# EAGLE board Qwiic LED Stick-Panel (EAGLE 9.6.2), part 1 of 2
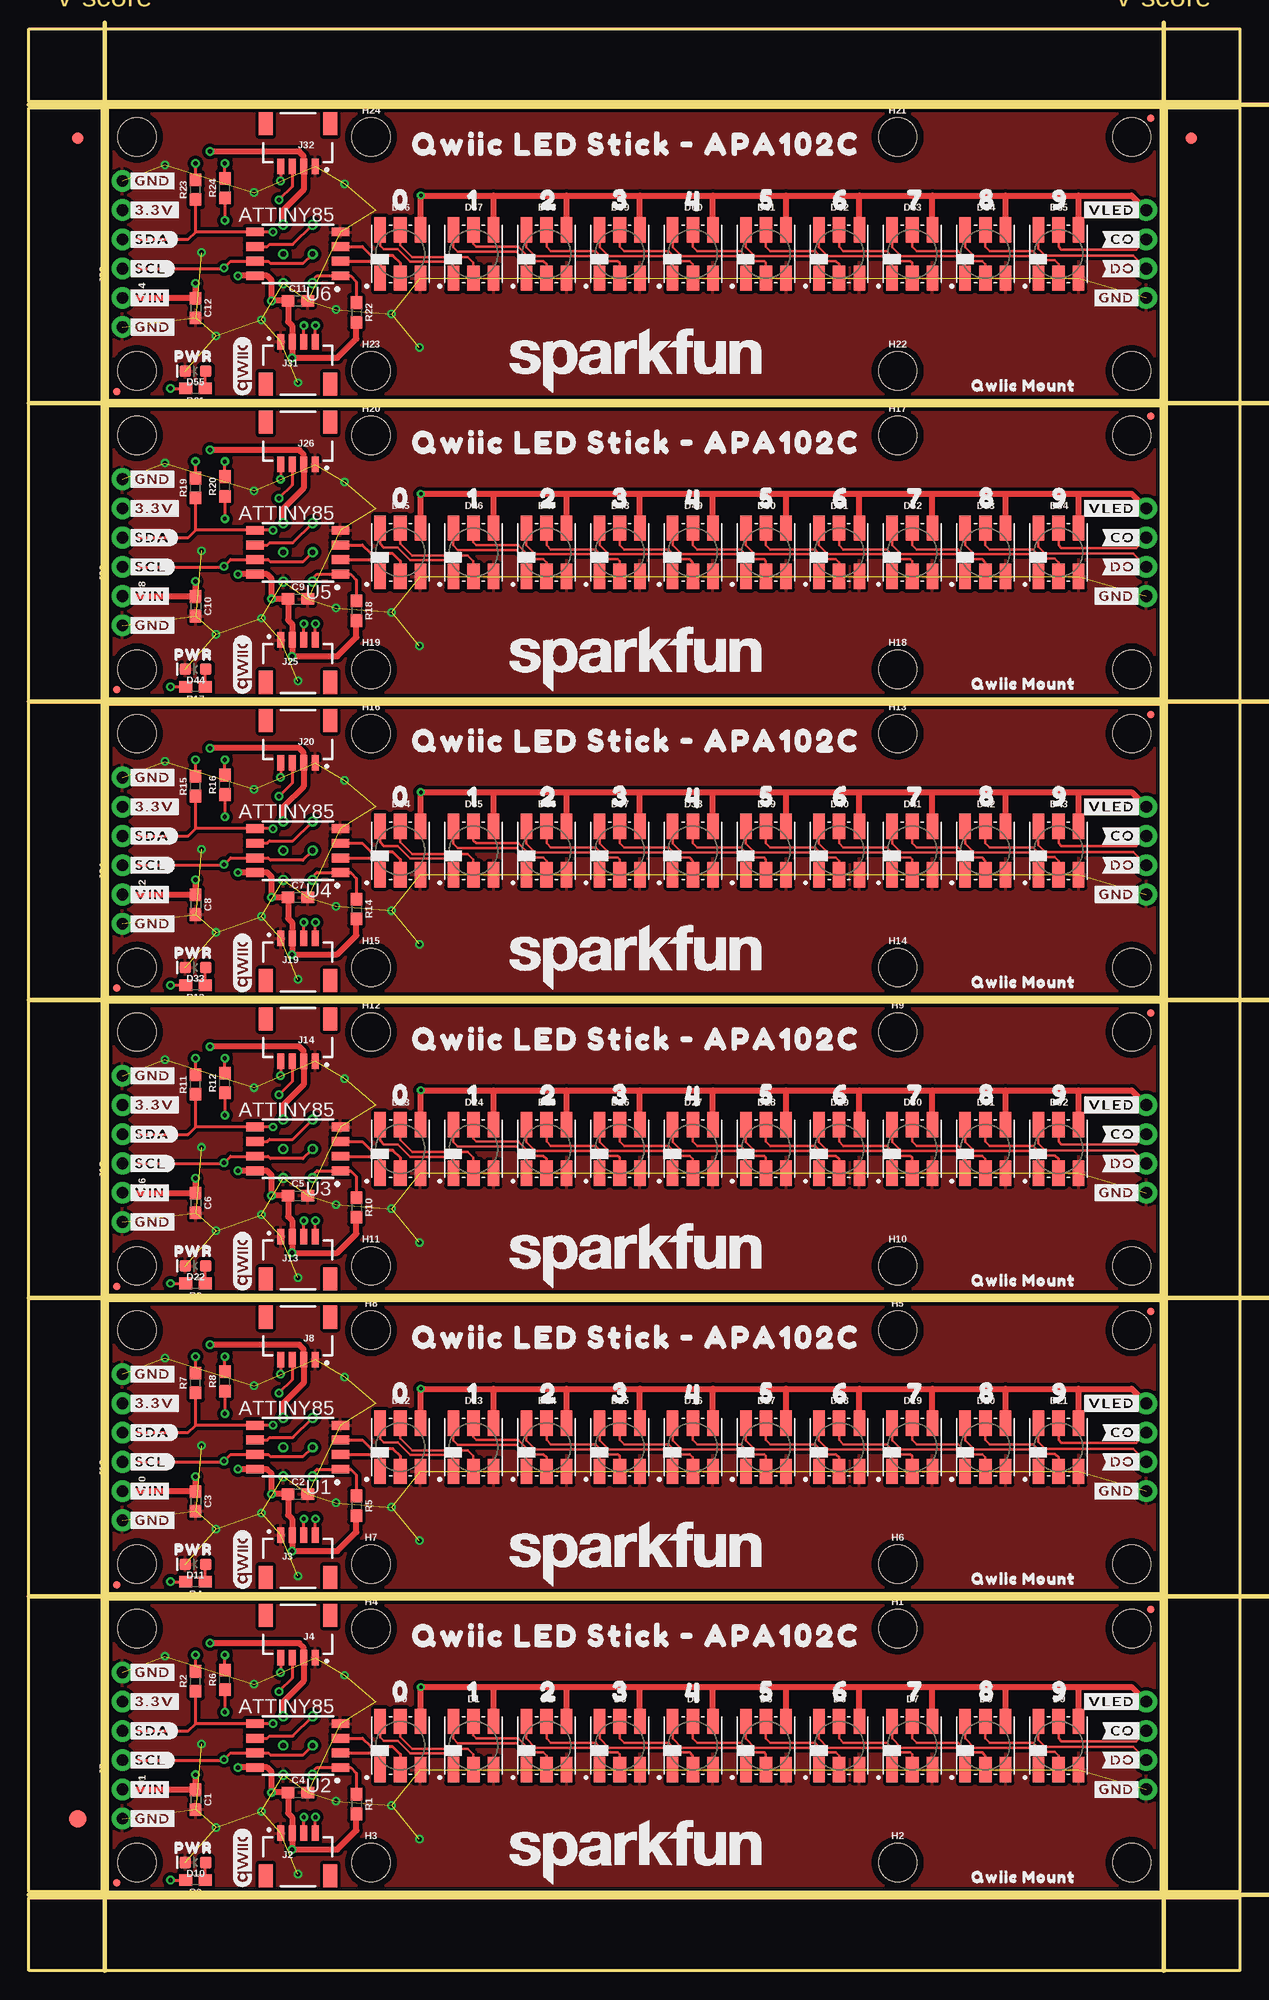
[diagram p0: board, top side]
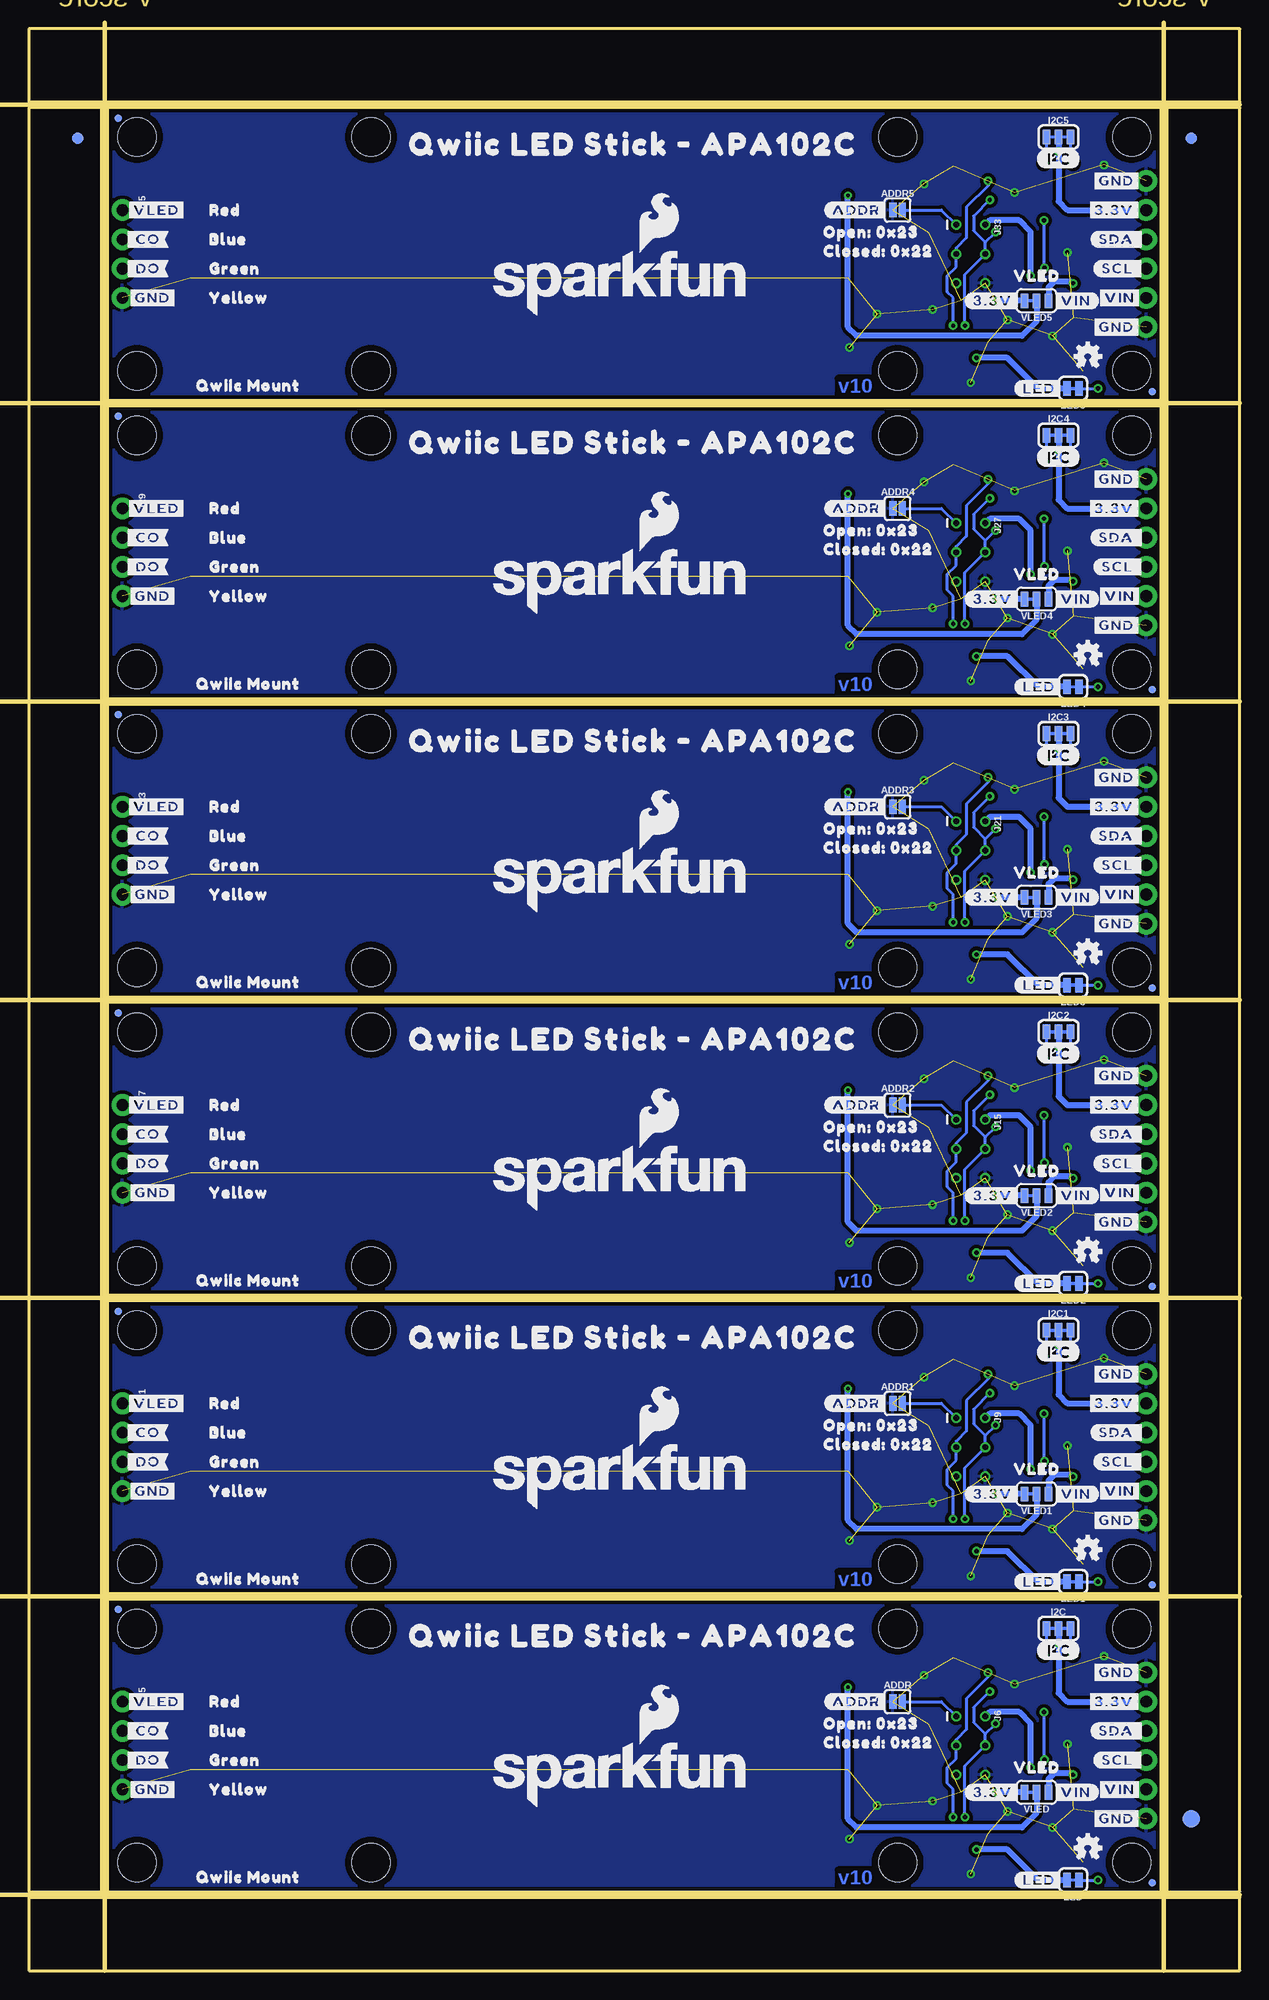
[diagram p1: board, bottom side, seen from below]

Size 105.16 x 168.66 mm. Coordinates in mm from the lower left corner, seen from the top.
Outline: 98.3,6.86 6.86,6.86 6.86,32.26 98.3,32.26 98.3,6.86
Outline: 98.3,32.77 6.86,32.77 6.86,58.17 98.3,58.17 98.3,32.77
Outline: 98.3,58.67 6.86,58.67 6.86,84.07 98.3,84.07 98.3,58.67
Outline: 98.3,84.58 6.86,84.58 6.86,109.98 98.3,109.98 98.3,84.58
Outline: 98.3,110.49 6.86,110.49 6.86,135.89 98.3,135.89 98.3,110.49
Outline: 98.3,136.4 6.86,136.4 6.86,161.8 98.3,161.8 98.3,136.4
Outline: 0,6.35 105.16,6.35 105.16,0 0,0 0,6.35
Outline: 98.81,161.8 105.16,161.8 105.16,6.86 98.81,6.86 98.81,161.8
Outline: 0,168.66 105.16,168.66 105.16,162.31 0,162.31 0,168.66
Outline: 0,161.8 6.35,161.8 6.35,6.86 0,6.86 0,161.8
Copper layers (1*16): Top 0.035mm / dielectric 1.5mm / Bottom 0.035mm
Design rules "Qwiic LED Stick": minimum track width 7mil, minimum drill 0.3mm, track to track 7mil, track to pad 7mil, pad to pad 7mil, via to via 7mil, smd to smd 7mil, copper to edge 7mil, drill to drill 7mil, minimum pad ring 7mil, minimum via ring 7mil, stop-mask expansion 3mil, vias tented up to drill 25mil, thermal gap 10mil
Milling: 9 lines

## Footprints (pad centres in the part's own frame; a part is rotated, then mirrored left to right if it is on the bottom)
SMT-JUMPER_2_NO_SILK = smd 0.635 x 1.27: 1 -0.406,0; 2 0.406,0
0603 = smd 1.1 x 1: 1 -0.85,0; 2 0.85,0
APA102-5050 = smd 1 x 2.2: P1 -1.75,-2.1; P3 1.75,-2.1; P4 1.75,2.1; P6 -1.75,2.1 | smd 1.1 x 2.2: P2 0,-2.1; P5 0,2.1
LED-0603 = smd 1 x 1: A -0.877,0; C 0.877,0
FIDUCIAL-1X2 = smd 1 x 1: 1 0,0
FIDUCIAL-1.5X3 = smd 1.5 x 1.5: 1 0,0
STAND-OFF = hole 3.302: 0,0
SMT-JUMPER_3_2-NC_TRACE_SILK = smd 0.66 x 1.27: 1 -1.041,0; 2 0,0; 3 1.041,0
1X02_NO_SILK = drill 1.016 pad 1.88: 1 0,0; 2 2.54,0
JST04_1MM_RA = smd 0.6 x 1.35: 1 -1.5,0; 2 -0.5,0; 3 0.5,0; 4 1.5,0 | smd 1.2 x 2: NC1 2.8,-3.675; NC2 -2.8,-3.675
1X04_NO_SILK = drill 1.016 pad 1.88: 1 0,0; 2 2.54,0; 3 5.08,0; 4 7.62,0
2X3_TEST_POINTS = drill 0.508: 1 -2.54,-1.27; 2 -2.54,1.27; 3 0,-1.27; 4 0,1.27; 5 2.54,-1.27; 6 2.54,1.27
FIDUCIAL-MICRO = smd 0.635 x 0.635: 1 0,0
SMT-JUMPER_2_NC_TRACE_SILK = smd 0.66 x 1.27: 1 -0.521,0; 2 0.521,0
ATTINY85 = smd 1.524 x 0.762: 1 -3.683,1.905; 2 -3.683,0.635; 3 -3.683,-0.635; 4 -3.683,-1.905; 5 3.727,-1.905; 6 3.727,-0.635; 7 3.727,0.635; 8 3.727,1.905
SMT-JUMPER_3_1-NC_TRACE_SILK = smd 0.66 x 1.27: 1 -1.041,0; 2 0,0; 3 1.041,0

## Placement (x,y rotation side)
ADDR  JUMPER-SMT_2_NO_SILK  [SMT-JUMPER_2_NO_SILK]  29.72,23.37 0 bottom
ADDR1  JUMPER-SMT_2_NO_SILK  [SMT-JUMPER_2_NO_SILK]  29.72,49.28 0 bottom
ADDR2  JUMPER-SMT_2_NO_SILK  [SMT-JUMPER_2_NO_SILK]  29.72,75.18 0 bottom
ADDR3  JUMPER-SMT_2_NO_SILK  [SMT-JUMPER_2_NO_SILK]  29.72,101.09 0 bottom
ADDR4  JUMPER-SMT_2_NO_SILK  [SMT-JUMPER_2_NO_SILK]  29.72,127 0 bottom
ADDR5  JUMPER-SMT_2_NO_SILK  [SMT-JUMPER_2_NO_SILK]  29.72,152.91 0 bottom
C1  4.7uF  [0603]  14.48,14.86 270 top
C2  0.1uF  [0603]  23.37,41.4 0 top
C3  4.7uF  [0603]  14.48,40.77 270 top
C4  0.1uF  [0603]  23.37,15.49 0 top
C5  0.1uF  [0603]  23.37,67.31 0 top
C6  4.7uF  [0603]  14.48,66.67 270 top
C7  0.1uF  [0603]  23.37,93.22 0 top
C8  4.7uF  [0603]  14.48,92.58 270 top
C9  0.1uF  [0603]  23.37,119.13 0 top
C10  4.7uF  [0603]  14.48,118.49 270 top
C11  0.1uF  [0603]  23.37,145.03 0 top
C12  4.7uF  [0603]  14.48,144.4 270 top
D0  APA102-5050  [APA102-5050]  32.26,19.56 0 top
D1  APA102-5050  [APA102-5050]  38.61,19.56 0 top
D2  APA102-5050  [APA102-5050]  44.96,19.56 0 top
D3  APA102-5050  [APA102-5050]  51.31,19.56 0 top
D4  APA102-5050  [APA102-5050]  57.66,19.56 0 top
D5  APA102-5050  [APA102-5050]  64.01,19.56 0 top
D6  APA102-5050  [APA102-5050]  70.36,19.56 0 top
D7  APA102-5050  [APA102-5050]  76.71,19.56 0 top
D8  APA102-5050  [APA102-5050]  83.06,19.56 0 top
D9  APA102-5050  [APA102-5050]  89.41,19.56 0 top
D10  RED  [LED-0603]  14.48,9.4 180 top
D11  RED  [LED-0603]  14.48,35.31 180 top
D12  APA102-5050  [APA102-5050]  32.26,45.47 0 top
D13  APA102-5050  [APA102-5050]  38.61,45.47 0 top
D14  APA102-5050  [APA102-5050]  44.96,45.47 0 top
D15  APA102-5050  [APA102-5050]  51.31,45.47 0 top
D16  APA102-5050  [APA102-5050]  57.66,45.47 0 top
D17  APA102-5050  [APA102-5050]  64.01,45.47 0 top
D18  APA102-5050  [APA102-5050]  70.36,45.47 0 top
D19  APA102-5050  [APA102-5050]  76.71,45.47 0 top
D20  APA102-5050  [APA102-5050]  83.06,45.47 0 top
D21  APA102-5050  [APA102-5050]  89.41,45.47 0 top
D22  RED  [LED-0603]  14.48,61.21 180 top
D23  APA102-5050  [APA102-5050]  32.26,71.37 0 top
D24  APA102-5050  [APA102-5050]  38.61,71.37 0 top
D25  APA102-5050  [APA102-5050]  44.96,71.37 0 top
D26  APA102-5050  [APA102-5050]  51.31,71.37 0 top
D27  APA102-5050  [APA102-5050]  57.66,71.37 0 top
D28  APA102-5050  [APA102-5050]  64.01,71.37 0 top
D29  APA102-5050  [APA102-5050]  70.36,71.37 0 top
D30  APA102-5050  [APA102-5050]  76.71,71.37 0 top
D31  APA102-5050  [APA102-5050]  83.06,71.37 0 top
D32  APA102-5050  [APA102-5050]  89.41,71.37 0 top
D33  RED  [LED-0603]  14.48,87.12 180 top
D34  APA102-5050  [APA102-5050]  32.26,97.28 0 top
D35  APA102-5050  [APA102-5050]  38.61,97.28 0 top
D36  APA102-5050  [APA102-5050]  44.96,97.28 0 top
D37  APA102-5050  [APA102-5050]  51.31,97.28 0 top
D38  APA102-5050  [APA102-5050]  57.66,97.28 0 top
D39  APA102-5050  [APA102-5050]  64.01,97.28 0 top
D40  APA102-5050  [APA102-5050]  70.36,97.28 0 top
D41  APA102-5050  [APA102-5050]  76.71,97.28 0 top
D42  APA102-5050  [APA102-5050]  83.06,97.28 0 top
D43  APA102-5050  [APA102-5050]  89.41,97.28 0 top
D44  RED  [LED-0603]  14.48,113.03 180 top
D45  APA102-5050  [APA102-5050]  32.26,123.19 0 top
D46  APA102-5050  [APA102-5050]  38.61,123.19 0 top
D47  APA102-5050  [APA102-5050]  44.96,123.19 0 top
D48  APA102-5050  [APA102-5050]  51.31,123.19 0 top
D49  APA102-5050  [APA102-5050]  57.66,123.19 0 top
D50  APA102-5050  [APA102-5050]  64.01,123.19 0 top
D51  APA102-5050  [APA102-5050]  70.36,123.19 0 top
D52  APA102-5050  [APA102-5050]  76.71,123.19 0 top
D53  APA102-5050  [APA102-5050]  83.06,123.19 0 top
D54  APA102-5050  [APA102-5050]  89.41,123.19 0 top
D55  RED  [LED-0603]  14.48,138.94 180 top
D56  APA102-5050  [APA102-5050]  32.26,149.1 0 top
D57  APA102-5050  [APA102-5050]  38.61,149.1 0 top
D58  APA102-5050  [APA102-5050]  44.96,149.1 0 top
D59  APA102-5050  [APA102-5050]  51.31,149.1 0 top
D60  APA102-5050  [APA102-5050]  57.66,149.1 0 top
D61  APA102-5050  [APA102-5050]  64.01,149.1 0 top
D62  APA102-5050  [APA102-5050]  70.36,149.1 0 top
D63  APA102-5050  [APA102-5050]  76.71,149.1 0 top
D64  APA102-5050  [APA102-5050]  83.06,149.1 0 top
D65  APA102-5050  [APA102-5050]  89.41,149.1 0 top
E$1  [FIDUCIAL-1X2]  4.23,159.13 0 top
E$2  [FIDUCIAL-1X2]  4.23,159.13 0 bottom
E$3  [FIDUCIAL-1X2]  100.92,159.13 0 top
E$4  [FIDUCIAL-1X2]  100.92,159.13 0 bottom
E$5  [FIDUCIAL-1.5X3]  4.23,13.21 0 top
E$6  [FIDUCIAL-1.5X3]  4.23,13.21 0 bottom
H1  STAND-OFF  [STAND-OFF]  75.44,29.72 0 top
H2  STAND-OFF  [STAND-OFF]  75.44,9.4 0 top
H3  STAND-OFF  [STAND-OFF]  29.72,9.4 0 top
H4  STAND-OFF  [STAND-OFF]  29.72,29.72 0 top
H5  STAND-OFF  [STAND-OFF]  75.44,55.63 0 top
H6  STAND-OFF  [STAND-OFF]  75.44,35.31 0 top
H7  STAND-OFF  [STAND-OFF]  29.72,35.31 0 top
H8  STAND-OFF  [STAND-OFF]  29.72,55.63 0 top
H9  STAND-OFF  [STAND-OFF]  75.44,81.53 0 top
H10  STAND-OFF  [STAND-OFF]  75.44,61.21 0 top
H11  STAND-OFF  [STAND-OFF]  29.72,61.21 0 top
H12  STAND-OFF  [STAND-OFF]  29.72,81.53 0 top
H13  STAND-OFF  [STAND-OFF]  75.44,107.44 0 top
H14  STAND-OFF  [STAND-OFF]  75.44,87.12 0 top
H15  STAND-OFF  [STAND-OFF]  29.72,87.12 0 top
H16  STAND-OFF  [STAND-OFF]  29.72,107.44 0 top
H17  STAND-OFF  [STAND-OFF]  75.44,133.35 0 top
H18  STAND-OFF  [STAND-OFF]  75.44,113.03 0 top
H19  STAND-OFF  [STAND-OFF]  29.72,113.03 0 top
H20  STAND-OFF  [STAND-OFF]  29.72,133.35 0 top
H21  STAND-OFF  [STAND-OFF]  75.44,159.26 0 top
H22  STAND-OFF  [STAND-OFF]  75.44,138.94 0 top
H23  STAND-OFF  [STAND-OFF]  29.72,138.94 0 top
H24  STAND-OFF  [STAND-OFF]  29.72,159.26 0 top
I2C  JUMPER-SMT_3_2-NC_TRACE_SILK  [SMT-JUMPER_3_2-NC_TRACE_SILK]  15.75,29.72 0 bottom
I2C1  JUMPER-SMT_3_2-NC_TRACE_SILK  [SMT-JUMPER_3_2-NC_TRACE_SILK]  15.75,55.63 0 bottom
I2C2  JUMPER-SMT_3_2-NC_TRACE_SILK  [SMT-JUMPER_3_2-NC_TRACE_SILK]  15.75,81.53 0 bottom
I2C3  JUMPER-SMT_3_2-NC_TRACE_SILK  [SMT-JUMPER_3_2-NC_TRACE_SILK]  15.75,107.44 0 bottom
I2C4  JUMPER-SMT_3_2-NC_TRACE_SILK  [SMT-JUMPER_3_2-NC_TRACE_SILK]  15.75,133.35 0 bottom
I2C5  JUMPER-SMT_3_2-NC_TRACE_SILK  [SMT-JUMPER_3_2-NC_TRACE_SILK]  15.75,159.26 0 bottom
J1  [1X02_NO_SILK]  8.13,15.75 270 top
J2  QWIIC_RA  [JST04_1MM_RA]  23.37,11.94 0 top
J3  QWIIC_RA  [JST04_1MM_RA]  23.37,37.85 0 top
J4  QWIIC_RA  [JST04_1MM_RA]  23.37,27.18 180 top
J5  [1X04_NO_SILK]  97.03,23.37 270 bottom
J6  AVR_SPI_PROG_3X2TESTPOINTS  [2X3_TEST_POINTS]  23.37,19.56 270 bottom
J7  [1X04_NO_SILK]  8.13,18.29 90 top
J8  QWIIC_RA  [JST04_1MM_RA]  23.37,53.09 180 top
J9  AVR_SPI_PROG_3X2TESTPOINTS  [2X3_TEST_POINTS]  23.37,45.47 270 bottom
J10  [1X02_NO_SILK]  8.13,41.66 270 top
J11  [1X04_NO_SILK]  97.03,49.28 270 bottom
J12  [1X04_NO_SILK]  8.13,44.2 90 top
J13  QWIIC_RA  [JST04_1MM_RA]  23.37,63.75 0 top
J14  QWIIC_RA  [JST04_1MM_RA]  23.37,78.99 180 top
J15  AVR_SPI_PROG_3X2TESTPOINTS  [2X3_TEST_POINTS]  23.37,71.37 270 bottom
J16  [1X02_NO_SILK]  8.13,67.56 270 top
J17  [1X04_NO_SILK]  97.03,75.18 270 bottom
J18  [1X04_NO_SILK]  8.13,70.1 90 top
J19  QWIIC_RA  [JST04_1MM_RA]  23.37,89.66 0 top
J20  QWIIC_RA  [JST04_1MM_RA]  23.37,104.9 180 top
J21  AVR_SPI_PROG_3X2TESTPOINTS  [2X3_TEST_POINTS]  23.37,97.28 270 bottom
J22  [1X02_NO_SILK]  8.13,93.47 270 top
J23  [1X04_NO_SILK]  97.03,101.09 270 bottom
J24  [1X04_NO_SILK]  8.13,96.01 90 top
J25  QWIIC_RA  [JST04_1MM_RA]  23.37,115.57 0 top
J26  QWIIC_RA  [JST04_1MM_RA]  23.37,130.81 180 top
J27  AVR_SPI_PROG_3X2TESTPOINTS  [2X3_TEST_POINTS]  23.37,123.19 270 bottom
J28  [1X02_NO_SILK]  8.13,119.38 270 top
J29  [1X04_NO_SILK]  97.03,127 270 bottom
J30  [1X04_NO_SILK]  8.13,121.92 90 top
J31  QWIIC_RA  [JST04_1MM_RA]  23.37,141.48 0 top
J32  QWIIC_RA  [JST04_1MM_RA]  23.37,156.72 180 top
J33  AVR_SPI_PROG_3X2TESTPOINTS  [2X3_TEST_POINTS]  23.37,149.1 270 bottom
J34  [1X02_NO_SILK]  8.13,145.29 270 top
J35  [1X04_NO_SILK]  97.03,152.91 270 bottom
J36  [1X04_NO_SILK]  8.13,147.83 90 top
JP1  FIDUCIALUFIDUCIAL  [FIDUCIAL-MICRO]  7.62,7.62 270 bottom
JP2  FIDUCIALUFIDUCIAL  [FIDUCIAL-MICRO]  97.41,31.37 90 top
JP3  STAND-OFF  [STAND-OFF]  9.4,9.4 90 top
JP4  STAND-OFF  [STAND-OFF]  9.4,29.72 90 top
JP5  FIDUCIALUFIDUCIAL  [FIDUCIAL-MICRO]  97.41,31.37 270 bottom
JP6  FIDUCIALUFIDUCIAL  [FIDUCIAL-MICRO]  7.62,7.62 90 top
JP7  STAND-OFF  [STAND-OFF]  95.76,29.72 0 top
JP8  STAND-OFF  [STAND-OFF]  95.76,9.4 0 top
JP9  STAND-OFF  [STAND-OFF]  9.4,35.31 90 top
JP10  STAND-OFF  [STAND-OFF]  9.4,55.63 90 top
JP11  FIDUCIALUFIDUCIAL  [FIDUCIAL-MICRO]  97.41,57.28 90 top
JP12  FIDUCIALUFIDUCIAL  [FIDUCIAL-MICRO]  7.62,33.53 90 top
JP13  FIDUCIALUFIDUCIAL  [FIDUCIAL-MICRO]  7.62,33.53 270 bottom
JP14  FIDUCIALUFIDUCIAL  [FIDUCIAL-MICRO]  97.41,57.28 270 bottom
JP15  STAND-OFF  [STAND-OFF]  95.76,55.63 0 top
JP16  STAND-OFF  [STAND-OFF]  95.76,35.31 0 top
JP17  STAND-OFF  [STAND-OFF]  9.4,61.21 90 top
JP18  STAND-OFF  [STAND-OFF]  9.4,81.53 90 top
JP19  FIDUCIALUFIDUCIAL  [FIDUCIAL-MICRO]  97.41,83.19 90 top
JP20  FIDUCIALUFIDUCIAL  [FIDUCIAL-MICRO]  7.62,59.44 90 top
JP21  FIDUCIALUFIDUCIAL  [FIDUCIAL-MICRO]  7.62,59.44 270 bottom
JP22  FIDUCIALUFIDUCIAL  [FIDUCIAL-MICRO]  97.41,83.19 270 bottom
JP23  STAND-OFF  [STAND-OFF]  95.76,81.53 0 top
JP24  STAND-OFF  [STAND-OFF]  95.76,61.21 0 top
JP25  STAND-OFF  [STAND-OFF]  9.4,87.12 90 top
JP26  STAND-OFF  [STAND-OFF]  9.4,107.44 90 top
JP27  FIDUCIALUFIDUCIAL  [FIDUCIAL-MICRO]  97.41,109.09 90 top
JP28  FIDUCIALUFIDUCIAL  [FIDUCIAL-MICRO]  7.62,85.34 90 top
JP29  FIDUCIALUFIDUCIAL  [FIDUCIAL-MICRO]  7.62,85.34 270 bottom
JP30  FIDUCIALUFIDUCIAL  [FIDUCIAL-MICRO]  97.41,109.09 270 bottom
JP31  STAND-OFF  [STAND-OFF]  95.76,107.44 0 top
JP32  STAND-OFF  [STAND-OFF]  95.76,87.12 0 top
JP33  STAND-OFF  [STAND-OFF]  9.4,113.03 90 top
JP34  STAND-OFF  [STAND-OFF]  9.4,133.35 90 top
JP35  FIDUCIALUFIDUCIAL  [FIDUCIAL-MICRO]  97.41,135 90 top
JP36  FIDUCIALUFIDUCIAL  [FIDUCIAL-MICRO]  7.62,111.25 90 top
JP37  FIDUCIALUFIDUCIAL  [FIDUCIAL-MICRO]  7.62,111.25 270 bottom
JP38  FIDUCIALUFIDUCIAL  [FIDUCIAL-MICRO]  97.41,135 270 bottom
JP39  STAND-OFF  [STAND-OFF]  95.76,133.35 0 top
JP40  STAND-OFF  [STAND-OFF]  95.76,113.03 0 top
JP41  STAND-OFF  [STAND-OFF]  9.4,138.94 90 top
JP42  STAND-OFF  [STAND-OFF]  9.4,159.26 90 top
JP43  FIDUCIALUFIDUCIAL  [FIDUCIAL-MICRO]  97.41,160.91 90 top
JP44  FIDUCIALUFIDUCIAL  [FIDUCIAL-MICRO]  7.62,137.16 90 top
JP45  FIDUCIALUFIDUCIAL  [FIDUCIAL-MICRO]  7.62,137.16 270 bottom
JP46  FIDUCIALUFIDUCIAL  [FIDUCIAL-MICRO]  97.41,160.91 270 bottom
JP47  STAND-OFF  [STAND-OFF]  95.76,159.26 0 top
JP48  STAND-OFF  [STAND-OFF]  95.76,138.94 0 top
LED  JUMPER-SMT_2_NC_TRACE_SILK  [SMT-JUMPER_2_NC_TRACE_SILK]  14.48,7.87 180 bottom
LED1  JUMPER-SMT_2_NC_TRACE_SILK  [SMT-JUMPER_2_NC_TRACE_SILK]  14.48,33.78 180 bottom
LED2  JUMPER-SMT_2_NC_TRACE_SILK  [SMT-JUMPER_2_NC_TRACE_SILK]  14.48,59.69 180 bottom
LED3  JUMPER-SMT_2_NC_TRACE_SILK  [SMT-JUMPER_2_NC_TRACE_SILK]  14.48,85.6 180 bottom
LED4  JUMPER-SMT_2_NC_TRACE_SILK  [SMT-JUMPER_2_NC_TRACE_SILK]  14.48,111.51 180 bottom
LED5  JUMPER-SMT_2_NC_TRACE_SILK  [SMT-JUMPER_2_NC_TRACE_SILK]  14.48,137.41 180 bottom
LOGO1  OSHW-LOGOMINI  [OSHW-LOGO-MINI]  13.21,10.67 0 bottom
LOGO2  SFE_LOGO_NAME.2_INCH  [SFE_LOGO_NAME_.2]  52.7,10.29 0 top
LOGO3  QWIIC_LOGO_5MM  [QWIIC_5MM]  18.54,9.78 90 top
LOGO4  SFE_LOGO_FLAME.2_INCH  [SFE_LOGO_FLAME_.2]  50.42,22.23 0 bottom
LOGO5  SFE_LOGO_NAME.2_INCH  [SFE_LOGO_NAME_.2]  53.85,17.02 0 bottom
LOGO6  OSHW-LOGOMINI  [OSHW-LOGO-MINI]  13.21,36.58 0 bottom
LOGO7  SFE_LOGO_NAME.2_INCH  [SFE_LOGO_NAME_.2]  52.7,36.2 0 top
LOGO8  QWIIC_LOGO_5MM  [QWIIC_5MM]  18.54,35.69 90 top
LOGO9  SFE_LOGO_FLAME.2_INCH  [SFE_LOGO_FLAME_.2]  50.42,48.13 0 bottom
LOGO10  SFE_LOGO_NAME.2_INCH  [SFE_LOGO_NAME_.2]  53.85,42.93 0 bottom
LOGO11  OSHW-LOGOMINI  [OSHW-LOGO-MINI]  13.21,62.48 0 bottom
LOGO12  SFE_LOGO_NAME.2_INCH  [SFE_LOGO_NAME_.2]  52.7,62.1 0 top
LOGO13  QWIIC_LOGO_5MM  [QWIIC_5MM]  18.54,61.59 90 top
LOGO14  SFE_LOGO_FLAME.2_INCH  [SFE_LOGO_FLAME_.2]  50.42,74.04 0 bottom
LOGO15  SFE_LOGO_NAME.2_INCH  [SFE_LOGO_NAME_.2]  53.85,68.83 0 bottom
LOGO16  OSHW-LOGOMINI  [OSHW-LOGO-MINI]  13.21,88.39 0 bottom
LOGO17  SFE_LOGO_NAME.2_INCH  [SFE_LOGO_NAME_.2]  52.7,88.01 0 top
LOGO18  QWIIC_LOGO_5MM  [QWIIC_5MM]  18.54,87.5 90 top
LOGO19  SFE_LOGO_FLAME.2_INCH  [SFE_LOGO_FLAME_.2]  50.42,99.95 0 bottom
LOGO20  SFE_LOGO_NAME.2_INCH  [SFE_LOGO_NAME_.2]  53.85,94.74 0 bottom
LOGO21  OSHW-LOGOMINI  [OSHW-LOGO-MINI]  13.21,114.3 0 bottom
LOGO22  SFE_LOGO_NAME.2_INCH  [SFE_LOGO_NAME_.2]  52.7,113.92 0 top
LOGO23  QWIIC_LOGO_5MM  [QWIIC_5MM]  18.54,113.41 90 top
LOGO24  SFE_LOGO_FLAME.2_INCH  [SFE_LOGO_FLAME_.2]  50.42,125.86 0 bottom
LOGO25  SFE_LOGO_NAME.2_INCH  [SFE_LOGO_NAME_.2]  53.85,120.65 0 bottom
LOGO26  OSHW-LOGOMINI  [OSHW-LOGO-MINI]  13.21,140.21 0 bottom
LOGO27  SFE_LOGO_NAME.2_INCH  [SFE_LOGO_NAME_.2]  52.7,139.83 0 top
LOGO28  QWIIC_LOGO_5MM  [QWIIC_5MM]  18.54,139.32 90 top
LOGO29  SFE_LOGO_FLAME.2_INCH  [SFE_LOGO_FLAME_.2]  50.42,151.77 0 bottom
LOGO30  SFE_LOGO_NAME.2_INCH  [SFE_LOGO_NAME_.2]  53.85,146.56 0 bottom
R1  4.7k  [0603]  28.45,14.48 270 top
R2  4.7k  [0603]  14.48,25.15 90 top
R3  1k  [0603]  14.48,7.87 180 top
R4  1k  [0603]  14.48,33.78 180 top
R5  4.7k  [0603]  28.45,40.39 270 top
R6  4.7k  [0603]  17.02,25.27 90 top
R7  4.7k  [0603]  14.48,51.05 90 top
R8  4.7k  [0603]  17.02,51.18 90 top
R9  1k  [0603]  14.48,59.69 180 top
R10  4.7k  [0603]  28.45,66.29 270 top
R11  4.7k  [0603]  14.48,76.96 90 top
R12  4.7k  [0603]  17.02,77.09 90 top
R13  1k  [0603]  14.48,85.6 180 top
R14  4.7k  [0603]  28.45,92.2 270 top
R15  4.7k  [0603]  14.48,102.87 90 top
R16  4.7k  [0603]  17.02,103 90 top
R17  1k  [0603]  14.48,111.51 180 top
R18  4.7k  [0603]  28.45,118.11 270 top
R19  4.7k  [0603]  14.48,128.78 90 top
R20  4.7k  [0603]  17.02,128.91 90 top
R21  1k  [0603]  14.48,137.41 180 top
R22  4.7k  [0603]  28.45,144.02 270 top
R23  4.7k  [0603]  14.48,154.69 90 top
R24  4.7k  [0603]  17.02,154.81 90 top
U1  ATTINY85  [ATTINY85]  23.37,45.47 180 top
U2  ATTINY85  [ATTINY85]  23.37,19.56 180 top
U3  ATTINY85  [ATTINY85]  23.37,71.37 180 top
U4  ATTINY85  [ATTINY85]  23.37,97.28 180 top
U5  ATTINY85  [ATTINY85]  23.37,123.19 180 top
U6  ATTINY85  [ATTINY85]  23.37,149.1 180 top
U$1  [#GND#0]  8.51,13.21 0 top
U$2  [#GND#0]  12.95,13.21 0 bottom
U$3  [#GND#0]  8.51,25.91 0 top
U$4  [#GND#0]  12.95,25.91 0 bottom
U$5  [#GND#0]  92.2,15.75 0 top
U$6  [#CO#0]  93.22,20.83 0 top
U$7  [#DO#0]  93.22,18.29 0 top
U$8  [#GND#0]  96.65,15.75 0 bottom
U$9  [#VLED#0]  91.31,23.37 0 top
U$10  [#ADDR#0]  36.07,23.37 0 bottom
U$11  [(I_SUPER2_C)]  17.65,27.81 0 bottom
U$12  [#VLED#0]  96.77,23.37 0 bottom
U$13  [(I_SUPER2_C)]  17.65,53.72 0 bottom
U$14  [#3#3V#0]  8.51,23.37 0 top
U$15  [#_DO#0]  96.9,18.29 0 bottom
U$16  [#_CO#0]  96.9,20.83 0 bottom
U$17  [#3#3V#0]  13.34,23.37 0 bottom
U$18  [#VIN#0]  8.51,15.75 0 top
U$19  [#VIN#0]  12.45,15.75 0 bottom
U$20  [#SDA#0]  8.51,20.83 0 top
U$21  [#SDA_#0]  12.95,20.83 0 bottom
U$22  [#SCL#0]  8.51,18.29 0 top
U$23  [#SCL_#0]  12.7,18.29 0 bottom
U$24  [#LED#0]  19.56,7.87 0 bottom
U$25  [#3#3V#1]  23.88,15.49 0 bottom
U$26  [PWR0]  11.94,10.67 0 top
U$27  [#GND#0]  8.51,39.12 0 top
U$28  [VLED0]  20.32,17.65 0 bottom
U$29  [#VIN#4]  16.26,15.49 0 bottom
U$30  [QWIIC_MOUNT5]  81.15,8.13 0 top
U$31  [00]  30.35,24.26 0 top
U$32  [10]  36.83,24.26 0 top
U$33  [20]  43.18,24.26 0 top
U$34  [30]  49.4,24.26 0 top
U$35  [40]  55.75,24.13 0 top
U$36  [50]  62.23,24.26 0 top
U$37  [60]  68.58,24.26 0 top
U$38  [70]  75.06,24.26 0 top
U$39  [80]  81.28,24.26 0 top
U$40  [90]  87.63,24.26 0 top
U$41  [RED0]  90.17,23.37 0 bottom
U$42  [BLUE0]  90.17,20.83 0 bottom
U$43  [GREEN0]  90.17,18.29 0 bottom
U$44  [YELLOW0]  90.17,15.75 0 bottom
U$45  [OPEN#_0X230]  36.83,21.46 0 bottom
U$46  [CLOSED#_0X220]  36.83,19.81 0 bottom
U$47  [QWIIC_MOUNT5]  91.31,8.13 0 bottom
U$48  [QWIIC_LED_STICK_#_APA102C0]  31.88,29.08 0 top
U$49  [QWIIC_LED_STICK_#_APA102C0]  73.53,29.08 0 bottom
U$50  [#GND#0]  12.95,39.12 0 bottom
U$51  [#GND#0]  8.51,51.82 0 top
U$52  [#GND#0]  12.95,51.82 0 bottom
U$53  [#3#3V#0]  8.51,49.28 0 top
U$54  [#3#3V#0]  13.34,49.28 0 bottom
U$55  [#SDA#0]  8.51,46.74 0 top
U$56  [#SDA_#0]  12.95,46.74 0 bottom
U$57  [#SCL#0]  8.51,44.2 0 top
U$58  [#SCL_#0]  12.7,44.2 0 bottom
U$59  [#LED#0]  19.56,33.78 0 bottom
U$60  [PWR0]  11.94,36.58 0 top
U$61  [#ADDR#0]  36.07,49.28 0 bottom
U$62  [#GND#0]  92.2,41.66 0 top
U$63  [#GND#0]  96.65,41.66 0 bottom
U$64  [#VLED#0]  91.31,49.28 0 top
U$65  [#VLED#0]  96.77,49.28 0 bottom
U$66  [#CO#0]  93.22,46.74 0 top
U$67  [#DO#0]  93.22,44.2 0 top
U$68  [#_DO#0]  96.9,44.2 0 bottom
U$69  [#_CO#0]  96.9,46.74 0 bottom
U$70  [#VIN#0]  8.51,41.66 0 top
U$71  [#VIN#0]  12.45,41.66 0 bottom
U$72  [VLED0]  20.32,43.56 0 bottom
U$73  [#3#3V#1]  23.88,41.4 0 bottom
U$74  [#VIN#4]  16.26,41.4 0 bottom
U$75  [QWIIC_MOUNT5]  81.15,34.04 0 top
U$76  [00]  30.35,50.16 0 top
U$77  [10]  36.83,50.16 0 top
U$78  [20]  43.18,50.16 0 top
U$79  [30]  49.4,50.16 0 top
U$80  [40]  55.75,50.04 0 top
U$81  [50]  62.23,50.16 0 top
U$82  [60]  68.58,50.16 0 top
U$83  [70]  75.06,50.16 0 top
U$84  [80]  81.28,50.16 0 top
U$85  [90]  87.63,50.16 0 top
U$86  [RED0]  90.17,49.28 0 bottom
U$87  [BLUE0]  90.17,46.74 0 bottom
U$88  [GREEN0]  90.17,44.2 0 bottom
U$89  [YELLOW0]  90.17,41.66 0 bottom
U$90  [OPEN#_0X230]  36.83,47.37 0 bottom
U$91  [CLOSED#_0X220]  36.83,45.72 0 bottom
U$92  [QWIIC_MOUNT5]  91.31,34.04 0 bottom
U$93  [QWIIC_LED_STICK_#_APA102C0]  31.88,54.99 0 top
U$94  [QWIIC_LED_STICK_#_APA102C0]  73.53,54.99 0 bottom
U$95  [(I_SUPER2_C)]  17.65,79.63 0 bottom
U$96  [#GND#0]  8.51,65.02 0 top
U$97  [#GND#0]  12.95,65.02 0 bottom
U$98  [#GND#0]  8.51,77.72 0 top
U$99  [#GND#0]  12.95,77.72 0 bottom
U$100  [#3#3V#0]  8.51,75.18 0 top
U$101  [#3#3V#0]  13.34,75.18 0 bottom
U$102  [#SDA#0]  8.51,72.64 0 top
U$103  [#SDA_#0]  12.95,72.64 0 bottom
U$104  [#SCL#0]  8.51,70.1 0 top
U$105  [#SCL_#0]  12.7,70.1 0 bottom
U$106  [#LED#0]  19.56,59.69 0 bottom
U$107  [PWR0]  11.94,62.48 0 top
U$108  [#ADDR#0]  36.07,75.18 0 bottom
U$109  [#GND#0]  92.2,67.56 0 top
U$110  [#GND#0]  96.65,67.56 0 bottom
U$111  [#VLED#0]  91.31,75.18 0 top
U$112  [#VLED#0]  96.77,75.18 0 bottom
U$113  [#CO#0]  93.22,72.64 0 top
U$114  [#DO#0]  93.22,70.1 0 top
U$115  [#_DO#0]  96.9,70.1 0 bottom
U$116  [#_CO#0]  96.9,72.64 0 bottom
U$117  [#VIN#0]  8.51,67.56 0 top
U$118  [#VIN#0]  12.45,67.56 0 bottom
U$119  [VLED0]  20.32,69.47 0 bottom
U$120  [#3#3V#1]  23.88,67.31 0 bottom
U$121  [#VIN#4]  16.26,67.31 0 bottom
U$122  [QWIIC_MOUNT5]  81.15,59.94 0 top
U$123  [00]  30.35,76.07 0 top
U$124  [10]  36.83,76.07 0 top
U$125  [20]  43.18,76.07 0 top
U$126  [30]  49.4,76.07 0 top
U$127  [40]  55.75,75.95 0 top
U$128  [50]  62.23,76.07 0 top
U$129  [60]  68.58,76.07 0 top
U$130  [70]  75.06,76.07 0 top
U$131  [80]  81.28,76.07 0 top
U$132  [90]  87.63,76.07 0 top
U$133  [RED0]  90.17,75.18 0 bottom
U$134  [BLUE0]  90.17,72.64 0 bottom
U$135  [GREEN0]  90.17,70.1 0 bottom
U$136  [YELLOW0]  90.17,67.56 0 bottom
U$137  [OPEN#_0X230]  36.83,73.28 0 bottom
U$138  [CLOSED#_0X220]  36.83,71.63 0 bottom
U$139  [QWIIC_MOUNT5]  91.31,59.94 0 bottom
U$140  [QWIIC_LED_STICK_#_APA102C0]  31.88,80.9 0 top
U$141  [QWIIC_LED_STICK_#_APA102C0]  73.53,80.9 0 bottom
U$142  [(I_SUPER2_C)]  17.65,105.54 0 bottom
U$143  [#GND#0]  8.51,90.93 0 top
U$144  [#GND#0]  12.95,90.93 0 bottom
U$145  [#GND#0]  8.51,103.63 0 top
U$146  [#GND#0]  12.95,103.63 0 bottom
U$147  [#3#3V#0]  8.51,101.09 0 top
U$148  [#3#3V#0]  13.34,101.09 0 bottom
U$149  [#SDA#0]  8.51,98.55 0 top
U$150  [#SDA_#0]  12.95,98.55 0 bottom
U$151  [#SCL#0]  8.51,96.01 0 top
U$152  [#SCL_#0]  12.7,96.01 0 bottom
U$153  [#LED#0]  19.56,85.6 0 bottom
U$154  [PWR0]  11.94,88.39 0 top
U$155  [#ADDR#0]  36.07,101.09 0 bottom
U$156  [#GND#0]  92.2,93.47 0 top
U$157  [#GND#0]  96.65,93.47 0 bottom
U$158  [#VLED#0]  91.31,101.09 0 top
U$159  [#VLED#0]  96.77,101.09 0 bottom
U$160  [#CO#0]  93.22,98.55 0 top
U$161  [#DO#0]  93.22,96.01 0 top
U$162  [#_DO#0]  96.9,96.01 0 bottom
U$163  [#_CO#0]  96.9,98.55 0 bottom
U$164  [#VIN#0]  8.51,93.47 0 top
U$165  [#VIN#0]  12.45,93.47 0 bottom
U$166  [VLED0]  20.32,95.38 0 bottom
U$167  [#3#3V#1]  23.88,93.22 0 bottom
U$168  [#VIN#4]  16.26,93.22 0 bottom
U$169  [QWIIC_MOUNT5]  81.15,85.85 0 top
U$170  [00]  30.35,101.98 0 top
U$171  [10]  36.83,101.98 0 top
U$172  [20]  43.18,101.98 0 top
U$173  [30]  49.4,101.98 0 top
U$174  [40]  55.75,101.85 0 top
U$175  [50]  62.23,101.98 0 top
U$176  [60]  68.58,101.98 0 top
U$177  [70]  75.06,101.98 0 top
U$178  [80]  81.28,101.98 0 top
U$179  [90]  87.63,101.98 0 top
U$180  [RED0]  90.17,101.09 0 bottom
U$181  [BLUE0]  90.17,98.55 0 bottom
U$182  [GREEN0]  90.17,96.01 0 bottom
U$183  [YELLOW0]  90.17,93.47 0 bottom
U$184  [OPEN#_0X230]  36.83,99.19 0 bottom
U$185  [CLOSED#_0X220]  36.83,97.54 0 bottom
U$186  [QWIIC_MOUNT5]  91.31,85.85 0 bottom
U$187  [QWIIC_LED_STICK_#_APA102C0]  31.88,106.81 0 top
U$188  [QWIIC_LED_STICK_#_APA102C0]  73.53,106.81 0 bottom
U$189  [(I_SUPER2_C)]  17.65,131.44 0 bottom
U$190  [#GND#0]  8.51,116.84 0 top
U$191  [#GND#0]  12.95,116.84 0 bottom
U$192  [#GND#0]  8.51,129.54 0 top
U$193  [#GND#0]  12.95,129.54 0 bottom
U$194  [#3#3V#0]  8.51,127 0 top
U$195  [#3#3V#0]  13.34,127 0 bottom
U$196  [#SDA#0]  8.51,124.46 0 top
U$197  [#SDA_#0]  12.95,124.46 0 bottom
U$198  [#SCL#0]  8.51,121.92 0 top
U$199  [#SCL_#0]  12.7,121.92 0 bottom
U$200  [#LED#0]  19.56,111.51 0 bottom
U$201  [PWR0]  11.94,114.3 0 top
U$202  [#ADDR#0]  36.07,127 0 bottom
U$203  [#GND#0]  92.2,119.38 0 top
U$204  [#GND#0]  96.65,119.38 0 bottom
U$205  [#VLED#0]  91.31,127 0 top
U$206  [#VLED#0]  96.77,127 0 bottom
U$207  [#CO#0]  93.22,124.46 0 top
U$208  [#DO#0]  93.22,121.92 0 top
U$209  [#_DO#0]  96.9,121.92 0 bottom
U$210  [#_CO#0]  96.9,124.46 0 bottom
U$211  [#VIN#0]  8.51,119.38 0 top
U$212  [#VIN#0]  12.45,119.38 0 bottom
U$213  [VLED0]  20.32,121.29 0 bottom
U$214  [#3#3V#1]  23.88,119.13 0 bottom
U$215  [#VIN#4]  16.26,119.13 0 bottom
U$216  [QWIIC_MOUNT5]  81.15,111.76 0 top
U$217  [00]  30.35,127.89 0 top
U$218  [10]  36.83,127.89 0 top
U$219  [20]  43.18,127.89 0 top
U$220  [30]  49.4,127.89 0 top
U$221  [40]  55.75,127.76 0 top
U$222  [50]  62.23,127.89 0 top
U$223  [60]  68.58,127.89 0 top
U$224  [70]  75.06,127.89 0 top
U$225  [80]  81.28,127.89 0 top
U$226  [90]  87.63,127.89 0 top
U$227  [RED0]  90.17,127 0 bottom
U$228  [BLUE0]  90.17,124.46 0 bottom
U$229  [GREEN0]  90.17,121.92 0 bottom
U$230  [YELLOW0]  90.17,119.38 0 bottom
U$231  [OPEN#_0X230]  36.83,125.09 0 bottom
U$232  [CLOSED#_0X220]  36.83,123.44 0 bottom
U$233  [QWIIC_MOUNT5]  91.31,111.76 0 bottom
U$234  [QWIIC_LED_STICK_#_APA102C0]  31.88,132.72 0 top
U$235  [QWIIC_LED_STICK_#_APA102C0]  73.53,132.72 0 bottom
U$236  [(I_SUPER2_C)]  17.65,157.35 0 bottom
U$237  [#GND#0]  8.51,142.75 0 top
U$238  [#GND#0]  12.95,142.75 0 bottom
U$239  [#GND#0]  8.51,155.45 0 top
U$240  [#GND#0]  12.95,155.45 0 bottom
U$241  [#3#3V#0]  8.51,152.91 0 top
U$242  [#3#3V#0]  13.34,152.91 0 bottom
U$243  [#SDA#0]  8.51,150.37 0 top
U$244  [#SDA_#0]  12.95,150.37 0 bottom
U$245  [#SCL#0]  8.51,147.83 0 top
U$246  [#SCL_#0]  12.7,147.83 0 bottom
U$247  [#LED#0]  19.56,137.41 0 bottom
U$248  [PWR0]  11.94,140.21 0 top
U$249  [#ADDR#0]  36.07,152.91 0 bottom
U$250  [#GND#0]  92.2,145.29 0 top
U$251  [#GND#0]  96.65,145.29 0 bottom
U$252  [#VLED#0]  91.31,152.91 0 top
U$253  [#VLED#0]  96.77,152.91 0 bottom
U$254  [#CO#0]  93.22,150.37 0 top
U$255  [#DO#0]  93.22,147.83 0 top
U$256  [#_DO#0]  96.9,147.83 0 bottom
U$257  [#_CO#0]  96.9,150.37 0 bottom
U$258  [#VIN#0]  8.51,145.29 0 top
U$259  [#VIN#0]  12.45,145.29 0 bottom
U$260  [VLED0]  20.32,147.19 0 bottom
U$261  [#3#3V#1]  23.88,145.03 0 bottom
U$262  [#VIN#4]  16.26,145.03 0 bottom
U$263  [QWIIC_MOUNT5]  81.15,137.67 0 top
U$264  [00]  30.35,153.8 0 top
U$265  [10]  36.83,153.8 0 top
U$266  [20]  43.18,153.8 0 top
U$267  [30]  49.4,153.8 0 top
U$268  [40]  55.75,153.67 0 top
U$269  [50]  62.23,153.8 0 top
U$270  [60]  68.58,153.8 0 top
U$271  [70]  75.06,153.8 0 top
U$272  [80]  81.28,153.8 0 top
U$273  [90]  87.63,153.8 0 top
U$274  [RED0]  90.17,152.91 0 bottom
U$275  [BLUE0]  90.17,150.37 0 bottom
U$276  [GREEN0]  90.17,147.83 0 bottom
U$277  [YELLOW0]  90.17,145.29 0 bottom
U$278  [OPEN#_0X230]  36.83,151 0 bottom
U$279  [CLOSED#_0X220]  36.83,149.35 0 bottom
U$280  [QWIIC_MOUNT5]  91.31,137.67 0 bottom
U$281  [QWIIC_LED_STICK_#_APA102C0]  31.88,158.62 0 top
U$282  [QWIIC_LED_STICK_#_APA102C0]  73.53,158.62 0 bottom
VLED  JUMPER-SMT_3_1-NC_TRACE_SILK  [SMT-JUMPER_3_1-NC_TRACE_SILK]  17.65,15.49 180 bottom
VLED1  JUMPER-SMT_3_1-NC_TRACE_SILK  [SMT-JUMPER_3_1-NC_TRACE_SILK]  17.65,41.4 180 bottom
VLED2  JUMPER-SMT_3_1-NC_TRACE_SILK  [SMT-JUMPER_3_1-NC_TRACE_SILK]  17.65,67.31 180 bottom
VLED3  JUMPER-SMT_3_1-NC_TRACE_SILK  [SMT-JUMPER_3_1-NC_TRACE_SILK]  17.65,93.22 180 bottom
VLED4  JUMPER-SMT_3_1-NC_TRACE_SILK  [SMT-JUMPER_3_1-NC_TRACE_SILK]  17.65,119.13 180 bottom
VLED5  JUMPER-SMT_3_1-NC_TRACE_SILK  [SMT-JUMPER_3_1-NC_TRACE_SILK]  17.65,145.03 180 bottom

## Library data of the parts
ADDR ADDR1-ADDR5 I2C I2C1-I2C5 LED LED1-LED5 VLED VLED1-VLED5 = SparkFun-Jumpers
C1 C3 C6 C8 C10 C12 = SparkFun-Capacitors; PROD_ID: CAP-08280
C2 C4 C5 C7 C9 C11 = SparkFun-Capacitors; PROD_ID: CAP-00810
D0 D1-D9 D12-D21 D23-D32 D34-D43 D45-D54 D56-D65 = SparkFun-LED; PROD_ID: DIO-13739
D10 D11 D22 D33 D44 D55 = SparkFun-LED; PROD_ID: DIO-00819
E$1-E$4 JP1 JP2 JP5 JP6 JP11-JP14 JP19-JP22 JP27-JP30 JP35-JP38 JP43-JP46 LOGO1-LOGO30 = SparkFun-Aesthetics
E$5 E$6 = SparkFun-Retired
H1-H24 JP3 JP4 JP7-JP10 JP15-JP18 JP23-JP26 JP31-JP34 JP39-JP42 JP47 JP48 = SparkFun-Hardware
J1 J6 J7 J9 J10 J12 J15 J16 J18 J21 J22 J24 J27 J28 J30 J33 J34 J36 = SparkFun-Connectors
J2-J4 J8 J13 J14 J19 J20 J25 J26 J31 J32 = SparkFun-Connectors; PROD_ID: CONN-13694; VALUE: QWIIC_RIGHT_ANGLE
J5 J11 J17 J23 J29 J35 = SparkFun-Connectors; PROD_ID: CONN-09696
R1 R2 R5-R8 R10-R12 R14-R16 R18-R20 R22-R24 = SparkFun-Resistors; PROD_ID: RES-07857
R3 R4 R9 R13 R17 R21 = SparkFun-Resistors; PROD_ID: RES-07856
U1-U6 = SparkFun-IC-Microcontroller; PROD_ID: IC-09092
U$1-U$10 U$12 U$14-U$94 U$96-U$141 U$143-U$188 U$190-U$235 U$237-U$282 = output
U$11 U$13 U$95 U$142 U$189 U$236 = Labels-0_04

## Nets
3.3V: C4.1 I2C.2 J2.2 J4.2 J6.2 J7.3 LED.2 R1.2 U2.8 VLED.3
3.3V1: C2.1 I2C1.2 J3.2 J8.2 J9.2 J12.3 LED1.2 R5.2 U1.8 VLED1.3
3.3V2: C5.1 I2C2.2 J13.2 J14.2 J15.2 J18.3 LED2.2 R10.2 U3.8 VLED2.3
3.3V3: C7.1 I2C3.2 J19.2 J20.2 J21.2 J24.3 LED3.2 R14.2 U4.8 VLED3.3
3.3V4: C9.1 I2C4.2 J25.2 J26.2 J27.2 J30.3 LED4.2 R18.2 U5.8 VLED4.3
3.3V5: C11.1 I2C5.2 J31.2 J32.2 J33.2 J36.3 LED5.2 R22.2 U6.8 VLED5.3
!RST: J6.5 R1.1 U2.1
!RST1: J9.5 R5.1 U1.1
!RST2: J15.5 R10.1 U3.1
!RST3: J21.5 R14.1 U4.1
!RST4: J27.5 R18.1 U5.1
!RST5: J33.5 R22.1 U6.1
ADDR/CIPO: ADDR.2 J6.1 U2.6
ADDR/CIPO1: ADDR1.2 J9.1 U1.6
ADDR/CIPO2: ADDR2.2 J15.1 U3.6
ADDR/CIPO3: ADDR3.2 J21.1 U4.6
ADDR/CIPO4: ADDR4.2 J27.1 U5.6
ADDR/CIPO5: ADDR5.2 J33.1 U6.6
CLK: D0.P2 U2.3
CLK1: D12.P2 U1.3
CLK2: D23.P2 U3.3
CLK3: D34.P2 U4.3
CLK4: D45.P2 U5.3
CLK5: D56.P2 U6.3
CO(10): D9.P5 J5.2
CO(10)1: D21.P5 J11.2
CO(10)2: D32.P5 J17.2
CO(10)3: D43.P5 J23.2
CO(10)4: D54.P5 J29.2
CO(10)5: D65.P5 J35.2
DO: D0.P1 U2.2
DO1: D12.P1 U1.2
DO2: D23.P1 U3.2
DO3: D34.P1 U4.2
DO4: D45.P1 U5.2
DO5: D56.P1 U6.2
DO(10): D9.P6 J5.3
DO(10)1: D21.P6 J11.3
DO(10)2: D32.P6 J17.3
DO(10)3: D43.P6 J23.3
DO(10)4: D54.P6 J29.3
DO(10)5: D65.P6 J35.3
GND: ADDR.1 C1.2 C4.2 D0.P3 D1.P3 D2.P3 D3.P3 D4.P3 D5.P3 D6.P3 D7.P3 D8.P3 D9.P3 D10.C J1.2 J2.1 J4.1 J5.4 J6.6 J7.4 U2.4
GND1: ADDR1.1 C2.2 C3.2 D11.C D12.P3 D13.P3 D14.P3 D15.P3 D16.P3 D17.P3 D18.P3 D19.P3 D20.P3 D21.P3 J3.1 J8.1 J9.6 J10.2 J11.4 J12.4 U1.4
GND2: ADDR2.1 C5.2 C6.2 D22.C D23.P3 D24.P3 D25.P3 D26.P3 D27.P3 D28.P3 D29.P3 D30.P3 D31.P3 D32.P3 J13.1 J14.1 J15.6 J16.2 J17.4 J18.4 U3.4
GND3: ADDR3.1 C7.2 C8.2 D33.C D34.P3 D35.P3 D36.P3 D37.P3 D38.P3 D39.P3 D40.P3 D41.P3 D42.P3 D43.P3 J19.1 J20.1 J21.6 J22.2 J23.4 J24.4 U4.4
GND4: ADDR4.1 C9.2 C10.2 D44.C D45.P3 D46.P3 D47.P3 D48.P3 D49.P3 D50.P3 D51.P3 D52.P3 D53.P3 D54.P3 J25.1 J26.1 J27.6 J28.2 J29.4 J30.4 U5.4
GND5: ADDR5.1 C11.2 C12.2 D55.C D56.P3 D57.P3 D58.P3 D59.P3 D60.P3 D61.P3 D62.P3 D63.P3 D64.P3 D65.P3 J31.1 J32.1 J33.6 J34.2 J35.4 J36.4 U6.4
N$1: D11.A R4.1
N$2: D20.P6 D21.P1
N$3: D10.A R3.1
N$4: LED.1 R3.2
N$5: I2C.3 R2.2
N$6: I2C.1 R6.2
N$7: D20.P5 D21.P2
N$8: D8.P6 D9.P1
N$9: D8.P5 D9.P2
N$10: D7.P5 D8.P2
N$11: D7.P6 D8.P1
N$12: D6.P5 D7.P2
N$13: D6.P6 D7.P1
N$14: D5.P5 D6.P2
N$15: D5.P6 D6.P1
N$16: D4.P5 D5.P2
N$17: D4.P6 D5.P1
N$18: D3.P5 D4.P2
N$19: D3.P6 D4.P1
N$20: D2.P6 D3.P1
N$21: D2.P5 D3.P2
N$22: D1.P6 D2.P1
N$23: D1.P5 D2.P2
N$24: D0.P5 D1.P2
N$25: D0.P6 D1.P1
N$26: D19.P5 D20.P2
N$27: D19.P6 D20.P1
N$28: D18.P5 D19.P2
N$29: D18.P6 D19.P1
N$30: D17.P5 D18.P2
N$31: D17.P6 D18.P1
N$32: D16.P5 D17.P2
N$33: D16.P6 D17.P1
N$34: D15.P5 D16.P2
N$35: D15.P6 D16.P1
N$36: D14.P6 D15.P1
N$37: D14.P5 D15.P2
N$38: D13.P6 D14.P1
N$39: D13.P5 D14.P2
N$40: D12.P5 D13.P2
N$41: D12.P6 D13.P1
N$42: LED1.1 R4.2
N$43: I2C1.3 R7.2
N$44: I2C1.1 R8.2
N$45: D22.A R9.1
N$46: D31.P6 D32.P1
N$47: D31.P5 D32.P2
N$48: D30.P5 D31.P2
N$49: D30.P6 D31.P1
N$50: D29.P5 D30.P2
N$51: D29.P6 D30.P1
N$52: D28.P5 D29.P2
N$53: D28.P6 D29.P1
N$54: D27.P5 D28.P2
N$55: D27.P6 D28.P1
N$56: D26.P5 D27.P2
N$57: D26.P6 D27.P1
N$58: D25.P6 D26.P1
N$59: D25.P5 D26.P2
N$60: D24.P6 D25.P1
N$61: D24.P5 D25.P2
N$62: D23.P5 D24.P2
N$63: D23.P6 D24.P1
N$64: LED2.1 R9.2
N$65: I2C2.3 R11.2
N$66: I2C2.1 R12.2
N$67: D33.A R13.1
N$68: D42.P6 D43.P1
N$69: D42.P5 D43.P2
N$70: D41.P5 D42.P2
N$71: D41.P6 D42.P1
N$72: D40.P5 D41.P2
N$73: D40.P6 D41.P1
N$74: D39.P5 D40.P2
N$75: D39.P6 D40.P1
N$76: D38.P5 D39.P2
N$77: D38.P6 D39.P1
N$78: D37.P5 D38.P2
N$79: D37.P6 D38.P1
N$80: D36.P6 D37.P1
N$81: D36.P5 D37.P2
N$82: D35.P6 D36.P1
N$83: D35.P5 D36.P2
N$84: D34.P5 D35.P2
N$85: D34.P6 D35.P1
N$86: LED3.1 R13.2
N$87: I2C3.3 R15.2
N$88: I2C3.1 R16.2
N$89: D44.A R17.1
N$90: D53.P6 D54.P1
N$91: D53.P5 D54.P2
N$92: D52.P5 D53.P2
N$93: D52.P6 D53.P1
N$94: D51.P5 D52.P2
N$95: D51.P6 D52.P1
N$96: D50.P5 D51.P2
N$97: D50.P6 D51.P1
N$98: D49.P5 D50.P2
N$99: D49.P6 D50.P1
N$100: D48.P5 D49.P2
N$101: D48.P6 D49.P1
N$102: D47.P6 D48.P1
N$103: D47.P5 D48.P2
N$104: D46.P6 D47.P1
N$105: D46.P5 D47.P2
N$106: D45.P5 D46.P2
N$107: D45.P6 D46.P1
N$108: LED4.1 R17.2
N$109: I2C4.3 R19.2
N$110: I2C4.1 R20.2
N$111: D55.A R21.1
N$112: D64.P6 D65.P1
N$113: D64.P5 D65.P2
N$114: D63.P5 D64.P2
N$115: D63.P6 D64.P1
N$116: D62.P5 D63.P2
N$117: D62.P6 D63.P1
N$118: D61.P5 D62.P2
N$119: D61.P6 D62.P1
N$120: D60.P5 D61.P2
N$121: D60.P6 D61.P1
N$122: D59.P5 D60.P2
N$123: D59.P6 D60.P1
N$124: D58.P6 D59.P1
N$125: D58.P5 D59.P2
N$126: D57.P6 D58.P1
N$127: D57.P5 D58.P2
N$128: D56.P5 D57.P2
N$129: D56.P6 D57.P1
N$130: LED5.1 R21.2
N$131: I2C5.3 R23.2
N$132: I2C5.1 R24.2
SCL/SCK: J2.4 J4.4 J6.3 J7.1 R6.1 U2.7
SCL/SCK1: J3.4 J8.4 J9.3 J12.1 R8.1 U1.7
SCL/SCK2: J13.4 J14.4 J15.3 J18.1 R12.1 U3.7
SCL/SCK3: J19.4 J20.4 J21.3 J24.1 R16.1 U4.7
SCL/SCK4: J25.4 J26.4 J27.3 J30.1 R20.1 U5.7
SCL/SCK5: J31.4 J32.4 J33.3 J36.1 R24.1 U6.7
SDA/COPI: J2.3 J4.3 J6.4 J7.2 R2.1 U2.5
SDA/COPI1: J3.3 J8.3 J9.4 J12.2 R7.1 U1.5
SDA/COPI2: J13.3 J14.3 J15.4 J18.2 R11.1 U3.5
SDA/COPI3: J19.3 J20.3 J21.4 J24.2 R15.1 U4.5
SDA/COPI4: J25.3 J26.3 J27.4 J30.2 R19.1 U5.5
SDA/COPI5: J31.3 J32.3 J33.4 J36.2 R23.1 U6.5
VIN: C1.1 J1.1 VLED.1
VIN1: C3.1 J10.1 VLED1.1
VIN2: C6.1 J16.1 VLED2.1
VIN3: C8.1 J22.1 VLED3.1
VIN4: C10.1 J28.1 VLED4.1
VIN5: C12.1 J34.1 VLED5.1
VLED: D0.P4 D1.P4 D2.P4 D3.P4 D4.P4 D5.P4 D6.P4 D7.P4 D8.P4 D9.P4 J5.1 VLED.2
VLED1: D12.P4 D13.P4 D14.P4 D15.P4 D16.P4 D17.P4 D18.P4 D19.P4 D20.P4 D21.P4 J11.1 VLED1.2
VLED2: D23.P4 D24.P4 D25.P4 D26.P4 D27.P4 D28.P4 D29.P4 D30.P4 D31.P4 D32.P4 J17.1 VLED2.2
VLED3: D34.P4 D35.P4 D36.P4 D37.P4 D38.P4 D39.P4 D40.P4 D41.P4 D42.P4 D43.P4 J23.1 VLED3.2
VLED4: D45.P4 D46.P4 D47.P4 D48.P4 D49.P4 D50.P4 D51.P4 D52.P4 D53.P4 D54.P4 J29.1 VLED4.2
VLED5: D56.P4 D57.P4 D58.P4 D59.P4 D60.P4 D61.P4 D62.P4 D63.P4 D64.P4 D65.P4 J35.1 VLED5.2